# Altium PCB PCB1.PcbDoc
Units mm, origin at the board's own origin, x right, y up, seen from the top; angles counter-clockwise.
Board outline 50 x 28 mm, 4 copper layers (Top Layer, Layer 1, Layer 2, Bottom Layer), stack 1.748 mm thick; 18 components, 14 nets, 52 pads, 50 vias.
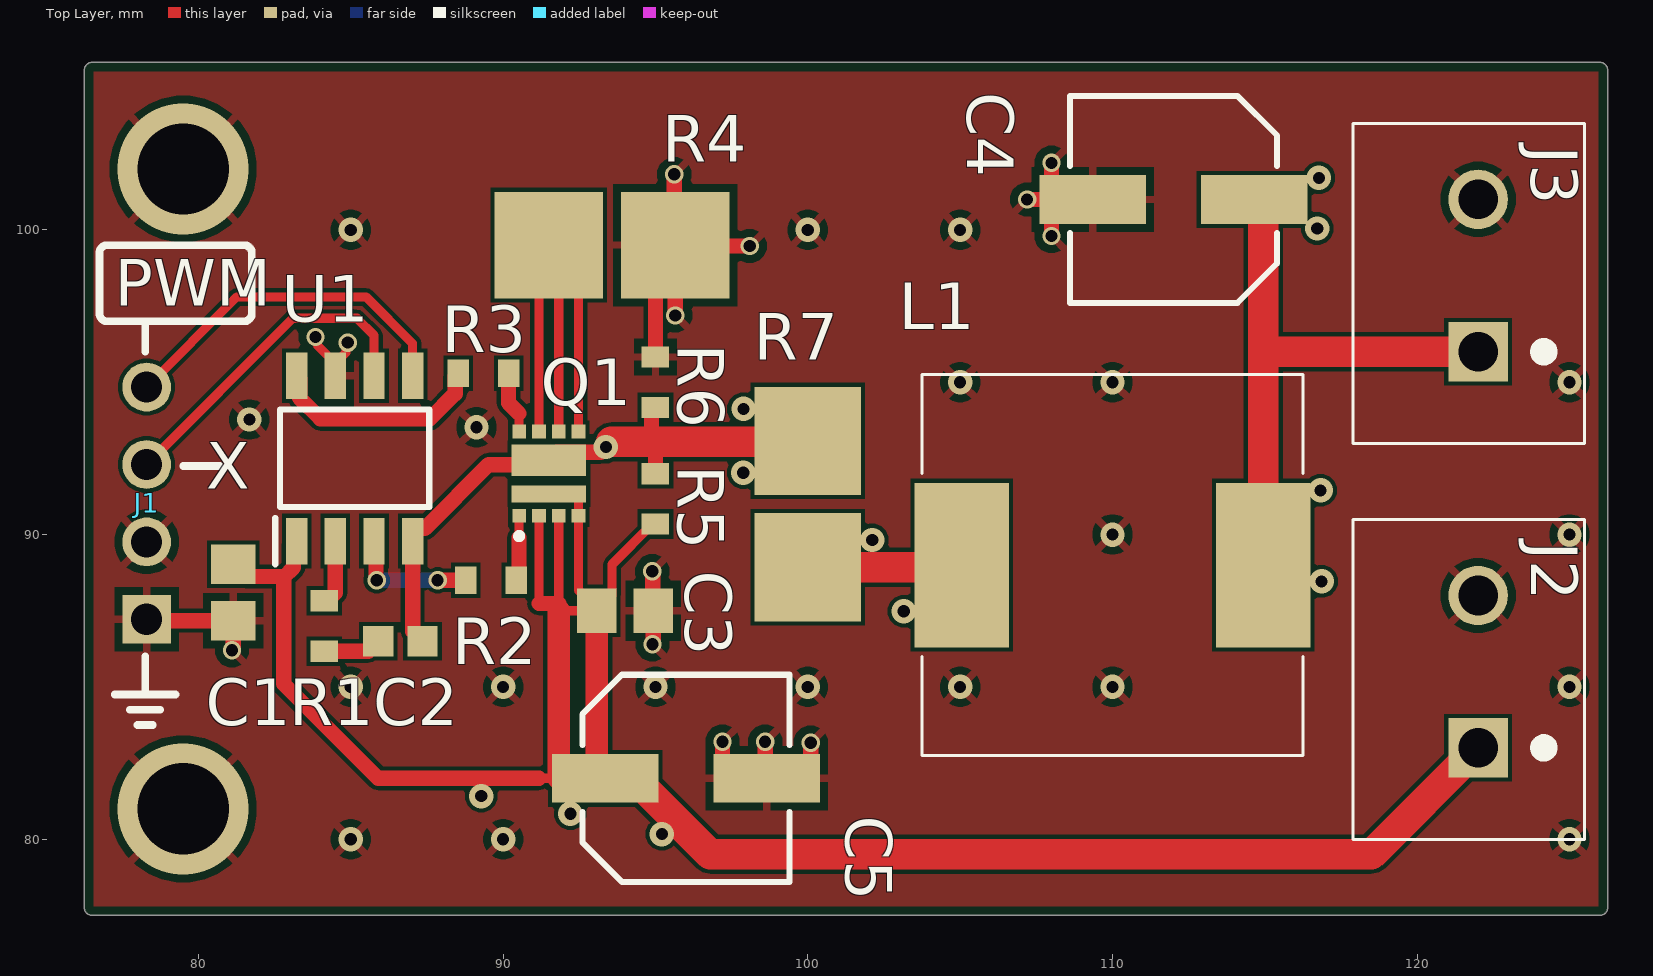
[diagram p0: Top Layer view]
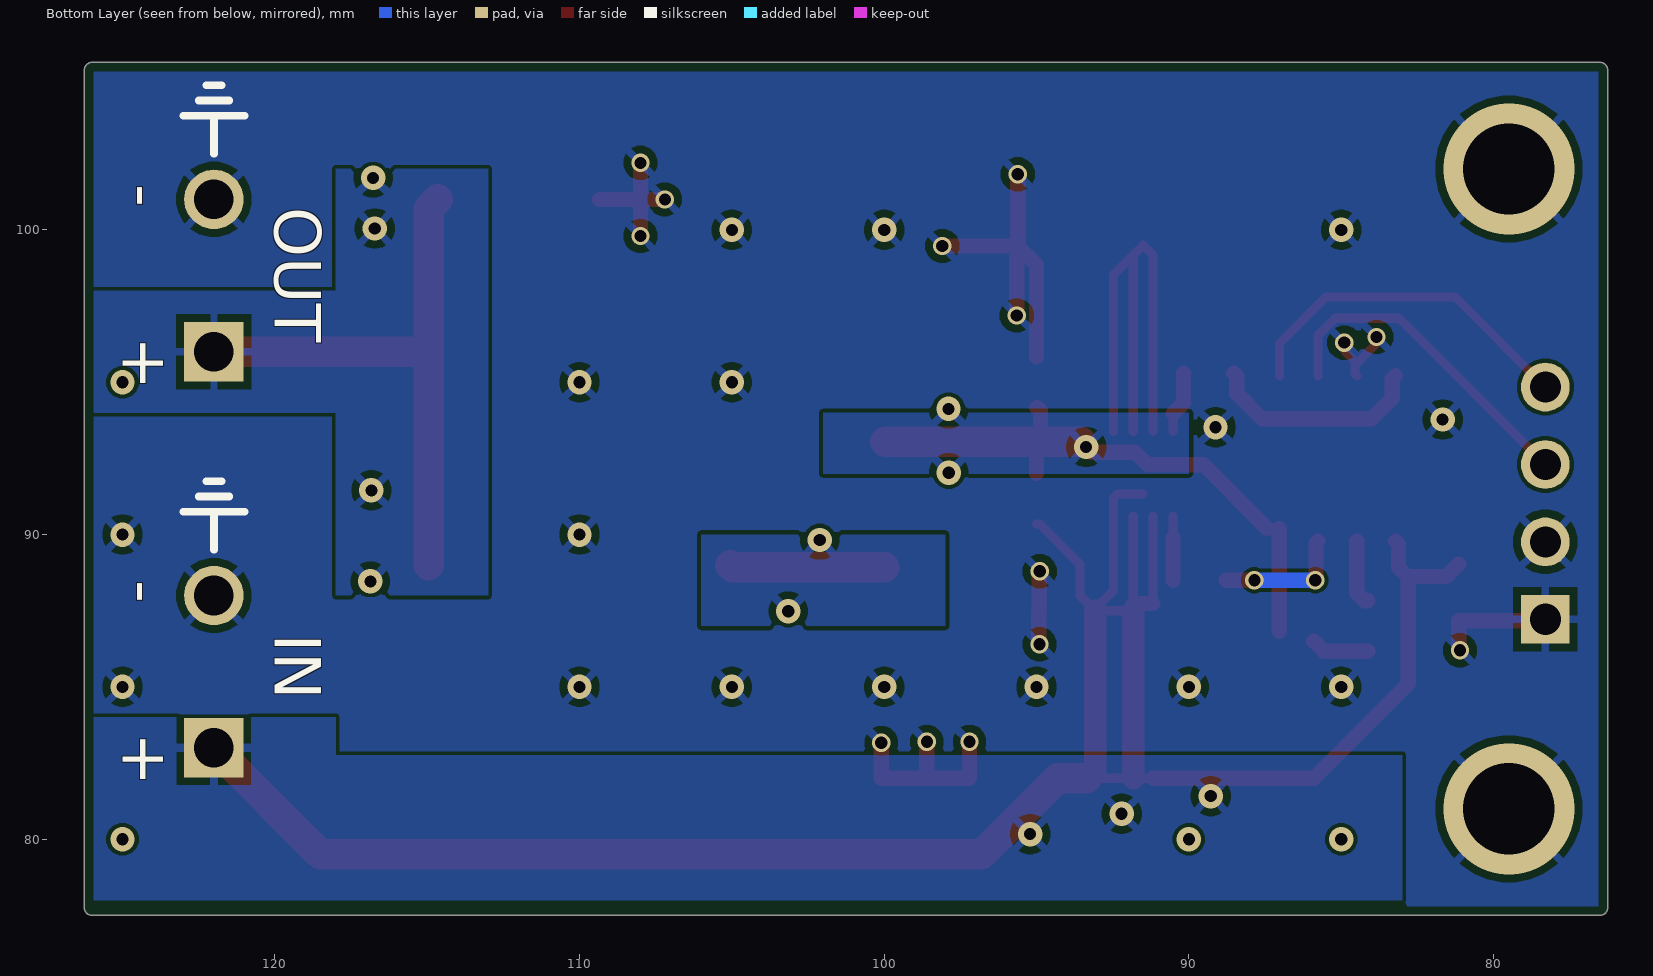
[diagram p1: Bottom Layer view, seen from below]
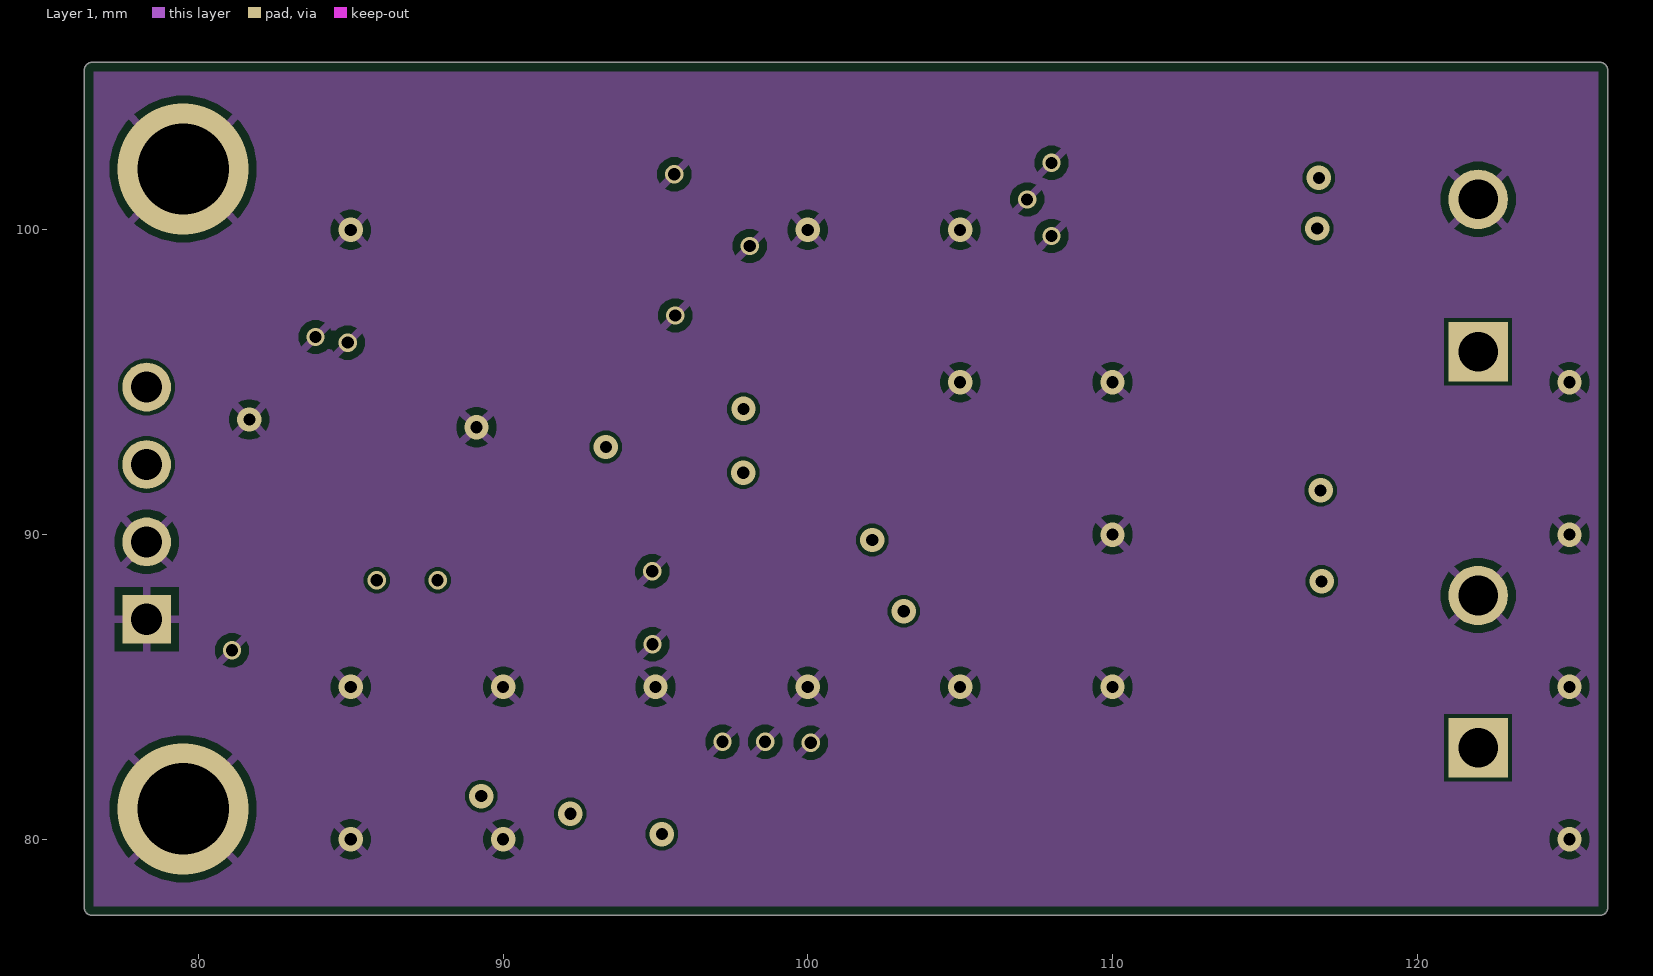
[diagram p2: Layer 1]
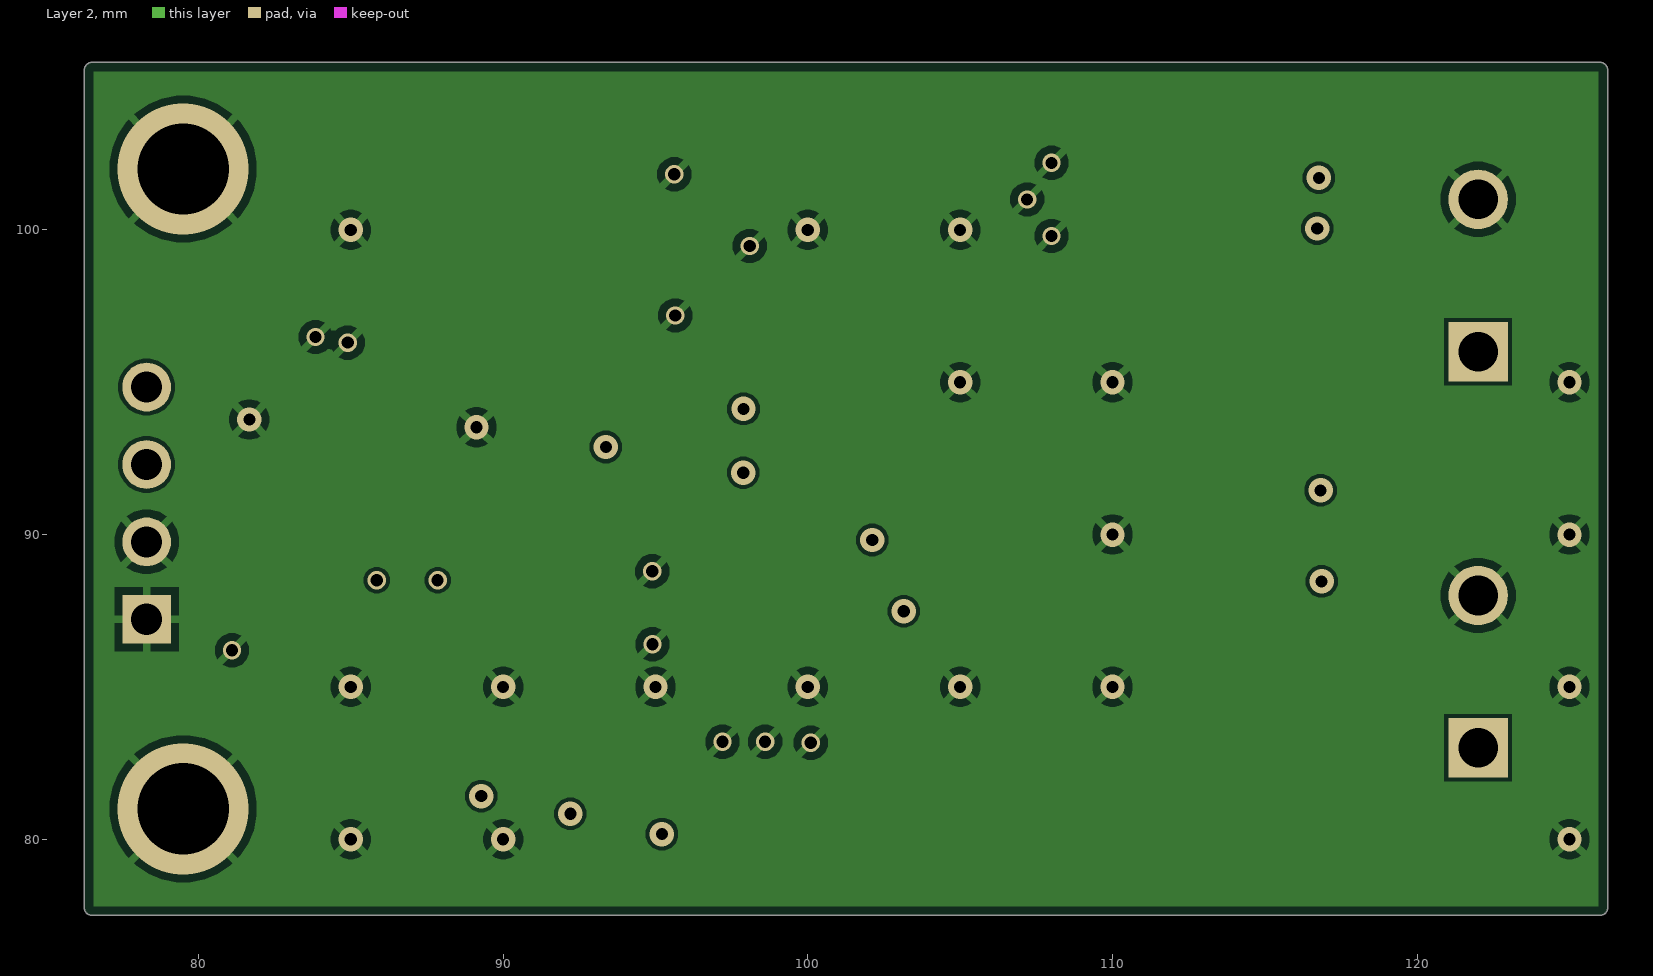
[diagram p3: Layer 2]

## Layer stack, top to bottom
Top Solder: solder mask 0.0102, Solder Resist, Dk 3.5
Top Layer: signal copper 0.0356
Dielectric 2: prepreg 0.0711, PP-006, Dk 4.1
Layer 1: signal copper 0.0175
Dielectric 1: dielectric 1.5, FR-4, Dk 4.8
Layer 2: signal copper 0.0175
Dielectric 3: prepreg 0.0711, PP-006, Dk 4.1
Bottom Layer: signal copper 0.0356
Bottom Solder: solder mask 0.0102, Solder Resist, Dk 3.5

## Board outline
76.254,77.754 76.254,105.246 cw(c76.508,105.246) 76.508,105.5 126,105.5 cw(c126,105.246) 126.254,105.246 126.254,77.754 cw(c126,77.754) 126,77.5 76.508,77.5 cw(c76.508,77.754)

## Design rules (kind name [scope] priority, off if disabled: settings)
BoardOutlineClearance [All] p1: gap=0.3 ignorepadtopadclearanceinfootprint=FALSE
Clearance [All] p1: gap=0.127 ignorepadtopadclearanceinfootprint=FALSE
HoleSize [All] p1: absolutevalues=TRUE maxlimit=6 minlimit=0.3 maxpercent=80.000 minpercent=20.000
HoleToHoleClearance [All] p1: gap=0.5 allowstackedmicrovias=TRUE
MinimumAnnularRing MinimumAnnularRing_1 [IsVia] p1: minimumring=0.1
MinimumAnnularRing [All] p2: minimumring=0.25
MinimumSolderMaskSliver [All] p1: minsoldermaskwidth=0.1
PolygonConnect [All] p1: connectstyle=Relief reliefconductorwidth=0.254 reliefentries=4 polygonreliefangle="90 Angle" conductorbypadedge=TRUE mindistance=0.3 enablemindistance=TRUE airgapwidth=0.254
RoutingVias [All] p1: holewidth=0.4 width=0.6 viastyle="Through Hole" minholewidth=0.3 minwidth=0.5 maxholewidth=3 maxwidth=4
SilkToSilkClearance [All] p1: silktosilkclearance=0.05
SilkToSolderMaskClearance [IsPad] p1: minsilkscreentomaskgap=0.15 clearancetoexposedcopper=TRUE
SolderMaskExpansion [All] p1: expansion=0.05 istentingtop=FALSE
Width [All] p1: maxlimit=10 minlimit=0.13 preferedwidth=0.3
25 further rules are at their usual default settings.

## Components (designator, comment, footprint, x,y, rotation, side; value= is the part's Value field where it differs from the comment)
C1 "1uF" CAP_SM0805_YAGEOCC2_N 81.142,88.1 r270 top
C2 "100nF" CAP_SM0603_YAGEOCC2_N 86.626,86.5 r0 top
C3 "1uF" CAP_SM0805_YAGEOCC2_N 94,87.5 r0 top
C4 "47u" CAPAE7366X61N 112,101 r180 top
C5 "47u" CAPAE7366X61N 96,82 r0 top
J1 "PinHeader_1x4" PinHeader_1x4_2.54mm 78.3,87.22 r180 top
J2 "Screw Terminal 2 Pin 5mm" TB00250002BE 122,83 r90 top
J3 "Screw Terminal 2 Pin 5mm" TB00250002BE 122,96 r90 top
L1 "PM127SH-330M-RC" PM127SH330MRC 110,89 r0 top
Q1 "SIZ342ADT-T1-GE3" SIZ342ADT-T1-GE3 91.5,92 r0 top
R1 "1R" RES_SM0603_YAGEORC_N 84.126,87 r270 top
R2 "10R" RES_SM0603_YAGEORC_N 89.6,88.5 r0 top
R3 "10R" RES_SM0603_YAGEORC_N 89.353,95.3 r0 top
R4 "0R020" MSMA2512R0200FGN 93.575,99.5 r180 top
R5 "DNP" RES_SM0603_YAGEORC_N 95,91.173 r270 top
R6 "DNP" RES_SM0603_YAGEORC_N 95,95 r270 top
R7 "0R020" MSMA2512R0200FGN 100,91 r90 top
U1 "MIC4605-2YM-TR" SOIC127P600X163-8N 85.126,92.5 r90 top

## Footprints (in the part's own frame and the unit in brackets; to place one, negate y for a bottom-side part, rotate by r counter-clockwise, add the part's x,y. Pads: shape width x height; smd on the part's side, far side on the other; paste and mask are expansions set on the pad)
CAP_SM0603_YAGEOCC2_N [mm] "Capacitor, Yageo CC Class2, SM0603, IPC Medium Density"
  rect 1x1 smd: 1(-0.727,0) 2(0.727,0)
  body extent -0.9,-0.5 0.9,0.5, height 0.9
CAP_SM0805_YAGEOCC2_N [mm] "Capacitor, Yageo CC Class2, SM0805, IPC Medium Density"
  rect 1.3x1.45 smd: 1(-0.927,0) 2(0.927,0)
  body extent -1.1,-0.72 1.1,0.72, height 1.45
CAPAE7366X61N [mm] "Aluminum Electrolytic Capacitor, Body 6,60x6,60x6,10mm, IPC Medium Density"
  rect 3.5x1.6 smd: 1(-2.65,0) 2(2.65,0)
  silkscreen extent -3.4,-3.4 3.4,3.4, body extent -3.68,-3.3 3.62,3.3, height 5.8
MSMA2512R0200FGN [mm]
  rect 3.55x3.5 smd: 1(-2.075,0) 2(2.075,0)
  body extent -3.3,-1.7 3.3,1.7, height 0.62
PinHeader_1x4_2.54mm [mm]
  rect 1.6x1.6 hole 1.02: 1(0,0)
  round 1.6 hole 1.02: 2(0,-2.54) 3(0,-5.08) 4(0,-7.62)
PM127SH330MRC [mm]
  rect 3.1x5.4 smd: 1(-4.95,0) 2(4.95,0)
  silkscreen extent -6.25,-6.25 6.25,6.25, body extent -6.25,-6.25 6.25,6.25, height 8.1
RES_SM0603_YAGEORC_N [mm] "Resistor, Yageo RC_L, SM0603, IPC Medium Density"
  rect 0.7x0.9 smd: 1(-0.827,0) 2(0.827,0)
  body extent -0.85,-0.45 0.85,0.45, height 0.55
SIZ342ADT-T1-GE3 [mm]
  rect 0.45x0.45 smd: 1(-0.975,-1.386) 2(-0.325,-1.386) 3(0.325,-1.386) 4(0.975,-1.386) 5(0.975,1.386) 6(0.325,1.386) 7(-0.325,1.386) 8(-0.975,1.386)
  rect 2.45x1.036 smd: 9(0,0.434)
  rect 2.45x0.562 smd: 10(0,-0.671)
  silkscreen extent -1.07,-2.15 -0.87,-1.95, body extent -1.49,-1.56 1.51,1.57, height 0.9
SOIC127P600X163-8N [mm]
  rect 1.525x0.7 smd: 1(-2.712,1.905) 2(-2.712,0.635) 3(-2.712,-0.635) 4(-2.712,-1.905) 5(2.712,-1.905) 6(2.712,-0.635) 7(2.712,0.635) 8(2.712,1.905)
  silkscreen extent -3.47,-2.45 1.6,2.61, body extent -3,-2.45 3,2.45, height 1.63
TB00250002BE [mm]
  rect 1.95x1.95 hole 1.3: 1(0,0)
  round 1.95 hole 1.3: 2(5,0)
  silkscreen extent -3,-3.5 7.5,4.1, body extent -2.96,-3.54 7.54,4.06, height 10

## Part data
C1 C3: library part CC0805KKX7R8BB105, "CAP 1uF SM0805 X7R 25V YAGEO CC2", Manufacturer=Yageo, Package=0805, Supplier Part Number 1=1458903, Tolerance (%)=10, Voltage Rating (Volts)=25, Category=Capacitor, ComponentLink1Description="Manufacturer Website", ComponentLink1URL=http://www.yageo.com, Manufacturer Part Number=CC0805KKX7R8BB105, Supplier 1=Farnell, Supplier 2=Digi-Key, Supplier 3=Mouser, Supplier Part Number 2=311-1456-1-ND, Supplier Part Number 3=603-CC805KKX7R8BB105
C2: library part CC0603KRX7R9BB104, "CAP 100nF SM0603 X7R 50V YAGEO CC2", Manufacturer=Yageo, Package=0603, Supplier Part Number 1=1362556, Tolerance (%)=10, Voltage Rating (Volts)=50, Category=Capacitor, ComponentLink1Description="Manufacturer Website", ComponentLink1URL=http://www.yageo.com, Manufacturer Part Number=CC0603KRX7R9BB104, Supplier 1=Farnell, Supplier 2=Mouser, Supplier Part Number 2=603-CC603KRX7R9BB104
C4 C5: library part EEE-FK1E470P, "Aluminium Electrolytic Capacitors - SMD 47uF 25V", Supplier Part Number 1=667-EEE-FK1E470P, Supplier 1=Mouser, Supplier 2=Digi-Key, Supplier 3=Digi-Key, Supplier Part Number 2=PCE3804CT-ND, Supplier Part Number 3=PCE3804DKR-ND
J1: library part PinHeader_1x4_2.54mm, "PinHeader_1x4 2.54mm Pitch"
J2 J3: library part TB00250002BE, "Fixed Terminal Blocks Terminal block, screw type, 5.00, horizontal, 2 poles, CUI Blue, slotted screw, PCB mount"
L1: "Bourns PM127SH Series Shielded Wire-wound SMD Inductor with a Ferrite Core, 33 uH +/-20% Wire-Wound 3.5A Idc Q:28", Manufacturer_Name=Bourns, Mouser Part Number=542-PM127SH-330M-RC, Supplier Part Number 1=PM127SH-330M-RCCT-ND, Datasheet Link=https://www.bourns.com/docs/Product-Datasheets/pm127sh_series.pdf, Geometry.Height=8mm, Manufacturer_Part_Number=PM127SH-330M-RC, Mouser Price/Stock=https://www.mouser.co.uk/ProductDetail/Bourns/PM127SH-330M-RC?qs=eR5JJ6cMb%252Bbm7NbWn3468w%3D%3D, Supplier 1=Digi-Key, Supplier 2=Digi-Key, Supplier 3=Mouser, Supplier Part Number 2=PM127SH-330M-RCDKR-ND, Supplier Part Number 3=542-PM127SH-330M-RC
Q1: "MOSFET 30V Vds 20V Vgs PowerPAIR 3 x 3", Manufacturer_Name="Vishay Semiconductors", Mouser Part Number=78-SIZ342ADT-T1-GE3, Datasheet Link=https://www.vishay.com/doc?76711, Geometry.Height=0.8mm, Manufacturer_Part_Number=SIZ342ADT-T1-GE3, Supplier 1=Mouser, Supplier Part Number 1=78-SIZ342ADT-T1-GE3
R1: library part RC0603FR-071RL, "RES 1R SM0603YAGEO RC_L", Manufacturer=Yageo, Manufacturer Part Number=RC0805FR-0710RL, Package=0805, Power (Watts)=0.125, Resistance (Ohms)=10, Supplier Part Number 1=311-1.00HRCT-ND, Tolerance (%)=1, Category=Resistor, ComponentLink1Description="Manufacturer Website", ComponentLink1URL=http://www.yageo.com, Supplier 1=Digi-Key, Supplier 2=Digi-Key, Supplier 3=Mouser, Supplier Part Number 2=311-1.00HRDKR-ND, Supplier Part Number 3=603-RC0603FR-071RL
R2 R3: library part RC0603FR-0710RL, "RES 10R SM0603 YAGEO RC_L", Manufacturer=Yageo, Package=0603, Power (Watts)=0.1, Resistance (Ohms)=10, Supplier Part Number 1=9238247, Tolerance (%)=1, Category=Resistor, ComponentLink1Description="Manufacturer Website", ComponentLink1URL=http://www.yageo.com, Manufacturer Part Number=RC0603FR-0710RL, Supplier 1=Farnell, Supplier 2=Digi-Key, Supplier Part Number 2=311-10.0HRCT-ND
R4 R7: library part MSMA2512R0200FGN, "RES SM0603YAGEO RC_L", Supplier Part Number 1=283-MSMA2512R0200FGNCT-ND, Supplier 1=Digi-Key, Supplier 2=Digi-Key, Supplier 3=Mouser, Supplier Part Number 2=283-MSMA2512R0200FGNDKR-ND, Supplier Part Number 3=504-MSMA2512R0200FGN
R5 R6: library part Resistor, "RES SM0603YAGEO RC_L", Manufacturer=Yageo, Manufacturer Part Number=RC0805FR-0710RL, Package=0805, Power (Watts)=0.125, Resistance (Ohms)=10, Supplier Part Number 1=311-1.00HRCT-ND, Tolerance (%)=1, Category=Resistor, ComponentLink1Description="Manufacturer Website", ComponentLink1URL=http://www.yageo.com, Supplier 1=Digi-Key, Supplier 2=Digi-Key, Supplier 3=Mouser, Supplier Part Number 2=311-1.00HRDKR-ND, Supplier Part Number 3=603-RC0603FR-071RL
U1: "Gate Drivers 85V Half Bridge MOSFET Driver", Manufacturer_Name=Microchip, Mouser Part Number=998-MIC4605-2YM-TR, Datasheet Link=http://www.microchip.com/mymicrochip/filehandler.aspx?ddocname=en579235, Geometry.Height=1.63mm, Manufacturer_Part_Number=MIC4605-2YM-TR, Mouser Price/Stock=https://www.mouser.co.uk/ProductDetail/Microchip-Technology/MIC4605-2YM-TR?qs=U6T8BxXiZAVl8W1xjIUxZQ%3D%3D, Supplier 1="Arrow Electronics", Supplier 2=Digi-Key, Supplier 3=Digi-Key, Supplier 4=Mouser, Supplier Part Number 1=MIC4605-2YM-TR, Supplier Part Number 2=576-4463-1-ND, Supplier Part Number 3=576-4463-6-ND, Supplier Part Number 4=998-MIC4605-2YM-TR

## Via types
v1: diameter 0.8, hole 0.4, Top Layer to Bottom Layer, 32 vias
v2: diameter 0.6, hole 0.4, Top Layer to Bottom Layer, 16 vias
v3: diameter 4.3, hole 3, Top Layer to Bottom Layer, 2 vias

## Nets (pads, with @x,y where several pads share a name; then routed paths per layer and width w, separated by ;. In a path a pad name is that pad's centre, name@x,y a point inside that pad or via, vN(x,y) a via of type N, cw(c..) or ccw(c..) an arc to the next point about the centre after c; other vN are vias at no path point)
GND: C1.2 C3.2 C4.2 C5.2 J1.1 J1.2 J2.2 J3.2 R4.1 R6.1 U1.7 | length 30.8
  Top Layer w0.3: v2(83.845,96.481) 83.903,96.424 83.903,96.213 U1.7@84.491,95.624 ; U1.7 84.546,95.266 84.546,95.624 U1.7@84.491,95.624 ; v2(84.9,96.3) 84.9,96.219 84.837,96.156 84.837,95.97 U1.7@84.491,95.624
  Top Layer w0.5: J1.1 78.347,87.173 C1.2 81.142,86.2 v2(81.1,86.2) ; v2(94.897,88.798) 94.912,88.783 94.912,87.515 C3.2 94.927,86.4 v2(94.9,86.4) ; R6.1 95,98.85 R4.1 ; v2(95.615,101.824) 95.615,99.535 R4.1 ; v2(95.651,97.194) R4.1@95.651,99.499 ; v2(97.2,83.2) 97.2,82 C5.2@98.6,82 ; v2(98.092,99.47) 95.68,99.47 R4.1 ; v2(98.6,83.2) C5.2@98.6,82 ; v2(100.098,83.168) 100.098,82 C5.2 C5.2@98.6,82 ; v2(107.2,101) C4.2@108,101 ; v2(108,99.8) C4.2@108,101 ; v2(108,102.2) C4.2@108,101 ; C4.2 C4.2@108,101
  other v1: 85,80 90,80 125,80 85,85 90,85 95,85 100,85 105,85 110,85 125,85 110,90 125,90 89.124,93.524 81.671,93.778 105,95 110,95 125,95 85,100 100,100 105,100
  other v3: 79.5,81 79.5,102
NetC1_1: C1.1 C3.1 C5.1 J2.1 Q1.2 Q1.3 Q1.4 Q1.10 R5.2 U1.1 | length 77.3
  Top Layer w0.3: 91.175,82 91.825,82 C5.1 ; 91.175,87.734 Q1.2 ; Q1.10 92.344,91.329 92.475,91.198 Q1.4 92.475,88.173 93.073,87.575 C3.1 ; Q1.3 91.825,87.5 C3.1 ; R5.2 94.9,90.346 93.573,89.019 93.573,88 C3.1
  Top Layer w0.5: C1.1 81.542,88.627 82.8,88.627 ; U1.1 83.121,89.688 83.121,88.921 82.8,88.6 82.8,85.1 85.9,82 91.175,82 ; 91.175,87.734 91.825,87.734 ; C5.1@93.073,82.277 C5.1
  Top Layer w0.75: C5.1@91.825,82 91.825,87.5 ; C5.1@93.073,82.277 C3.1
  Top Layer w1: C5.1 94.3,82 96.8,79.5 118.5,79.5 J2.1
  other v1: 95.212,80.169 92.207,80.838 89.28,81.416
NetC2_1: C2.1 R1.2 | length 1.9
  Top Layer w0.5: R1.2 85.572,86.173 C2.1
NetC2_2: C2.2 Q1.9 R5.1 R6.2 R7.2 U1.4 | length 19.4
  Top Layer w0.5: C2.2@87.031,86.822 U1.4 U1.4@87.031,90.2 ; 87.431,90.2 89.525,92.294 91.36,92.294 91.768,92.702 93.202,92.702 v1@93.543,93.043 ; R5.1 95,92.914 94.871,93.043 94.871,94.073 94.971,94.173 R6.2
  Top Layer w1: v1@93.543,93.043 94.871,93.043 R7.2@99.968,93.043
  other v1: 97.882,92.031 93.372,92.872 97.891,94.124
NetC4_1: C4.1 J3.1 L1.2 | length 19.2
  Top Layer w1: C4.1 114.95,100.7 114.95,96 ; L1.2 114.95,96 ; J3.1 114.95,96
  other v1: 116.866,88.463 116.831,91.451 116.719,100.046 116.777,101.708
NetJ1_3: J1.3 U1.6 | length 11
  Top Layer w0.3: J1.3 83.1,97.1 85.2,97.1 85.761,96.539 U1.6
NetJ1_4: J1.4 U1.5 | length 11.6
  Top Layer w0.3: J1.4 81.26,97.8 85.5,97.8 87.031,96.269 U1.5
NetL1_1: L1.1 R7.1 | length 5.1
  Top Layer w1: R7.1 104.975,88.925 L1.1
  other v1: 103.15,87.484 102.116,89.82
NetQ1_1: Q1.1 R2.2 | length 2.1
  Top Layer w0.3: 90.525,89.902 Q1.1
  Top Layer w0.5: R2.2@90.525,88.5 90.525,89.902
NetQ1_5: Q1.5 Q1.6 Q1.7 R4.2 | length 18.6
  Top Layer w0.3: Q1.7 91.175,99.175 R4.2 R4.2@91.825,99.175 ; Q1.6 R4.2@91.825,99.175 ; Q1.5 92.475,98.525 R4.2@91.825,99.175
NetQ1_8: Q1.8 R3.2 | length 2.1
  Top Layer w0.3: Q1.8 90.525,93.975
  Top Layer w0.5: R3.2 90.18,94.32 90.525,93.975
NetR1_1: R1.1 U1.2 | length 2.2
  Top Layer w0.5: R1.1 84.226,87.827 84.491,88.092 U1.2
NetR2_1: R2.1 U1.3 | length 4.2
  Top Layer w0.5: U1.3 85.831,89.718 85.831,88.519 v2(85.85,88.5) ; v2(87.85,88.5) R2.1
  Bottom Layer w0.5: v2(85.85,88.5) v2(87.85,88.5)
NetR3_1: R3.1 U1.8 | length 7.2
  Top Layer w0.5: U1.8 83.321,95.112 83.321,94.479 84,93.8 87.6,93.8 88.426,94.626 88.426,95.2 R3.1

## Polygon pours and split planes (outlines as drawn)
GND on Bottom Layer "GND_L04_P006" (solid, pour order 6): 76.508,105.5 76.508,77.5 126,77.5 126,105.5
NetC4_1 on Bottom Layer "NETC4_1_L04_P003" (solid, pour order 3): 113,102 113,88 118,88 118,94 126,94 126,98 118,98 118,102
NetC1_1 on Bottom Layer "NETC1_1_L04_P001" (solid, pour order 1): 126,78 126,84 118,84 118,82.75 83,82.75 83,78
NetC2_2 on Bottom Layer "NETC2_2_L04_P004" (solid, pour order 4): 90,94 102,94 102,92 90,92
NetL1_1 on Bottom Layer "NETL1_1_L04_P005" (solid, pour order 5): 98,90 98,87 106,87 106,90
GND on Layer 2 "GND_L03_P000" (solid, pour order 0): 76.508,105.5 76.508,77.5 126,77.5 126,105.5
GND on Layer 1 "GND_L02_P007" (solid, pour order 7): 76.508,105.5 76.508,77.5 126,77.5 126,105.5
GND on Top Layer "GND_L01_P008" (solid, pour order 8): 76.508,105.5 76.508,77.5 126,77.5 126,105.5

## Silkscreen, mask and mechanical layers (free items; w line width, h text height)
Top Overlay:
  lines w0.254: 77.75,84.25 78.75,84.25 ; 78,83.75 78.5,83.75 ; 78.25,86 78.25,84.75 77.25,84.75 79.25,84.75 ; 78.25,96 78.25,97 ; 79.5,92.25 80.7,92.25 ; 76.75,97.254 ccw(c77.004,97.254) 77.004,97 81.496,97 ccw(c81.496,97.254) 81.75,97.254 81.75,99.246 ccw(c81.496,99.246) 81.496,99.5 77.004,99.5 ccw(c77.004,99.246) 76.75,99.246 76.75,97.254
  text "PWM" at 77.254,97.504 h1.52
  text "X" at 80.254,91.504 h1.52
Bottom Overlay:
  lines w0.254: 121,90.75 123,90.75 ; 121,103.75 123,103.75 ; 121.5,91.25 122.5,91.25 ; 121.5,104.25 122.5,104.25 ; 121.75,91.75 122.25,91.75 ; 121.75,104.75 122.25,104.75 ; 122,89.5 122,90.75 ; 122,102.5 122,103.75
  text "-" at 125.008,101.496 h1.52 r90
  text "OUT" at 119.996,100.746 h1.52 r90
  text "+" at 125,96.496 h1.52 r90
  text "-" at 125.008,88.496 h1.52 r90
  text "IN" at 119.996,86.746 h1.52 r90
  text "+" at 125,83.496 h1.52 r90
Mechanical 1:
  the board outline again, w0.254